# Altium PCB zhernakov_pwron_circuit.PcbDoc (part 2 of 2)
Units mm, origin at the board's own origin, x right, y up, seen from the top; angles counter-clockwise.
Board outline 108 x 46 mm, 2 copper layers (Top Layer, Bottom Layer), stack 1.57 mm thick; 57 components, 33 nets, 171 pads, 151 vias.
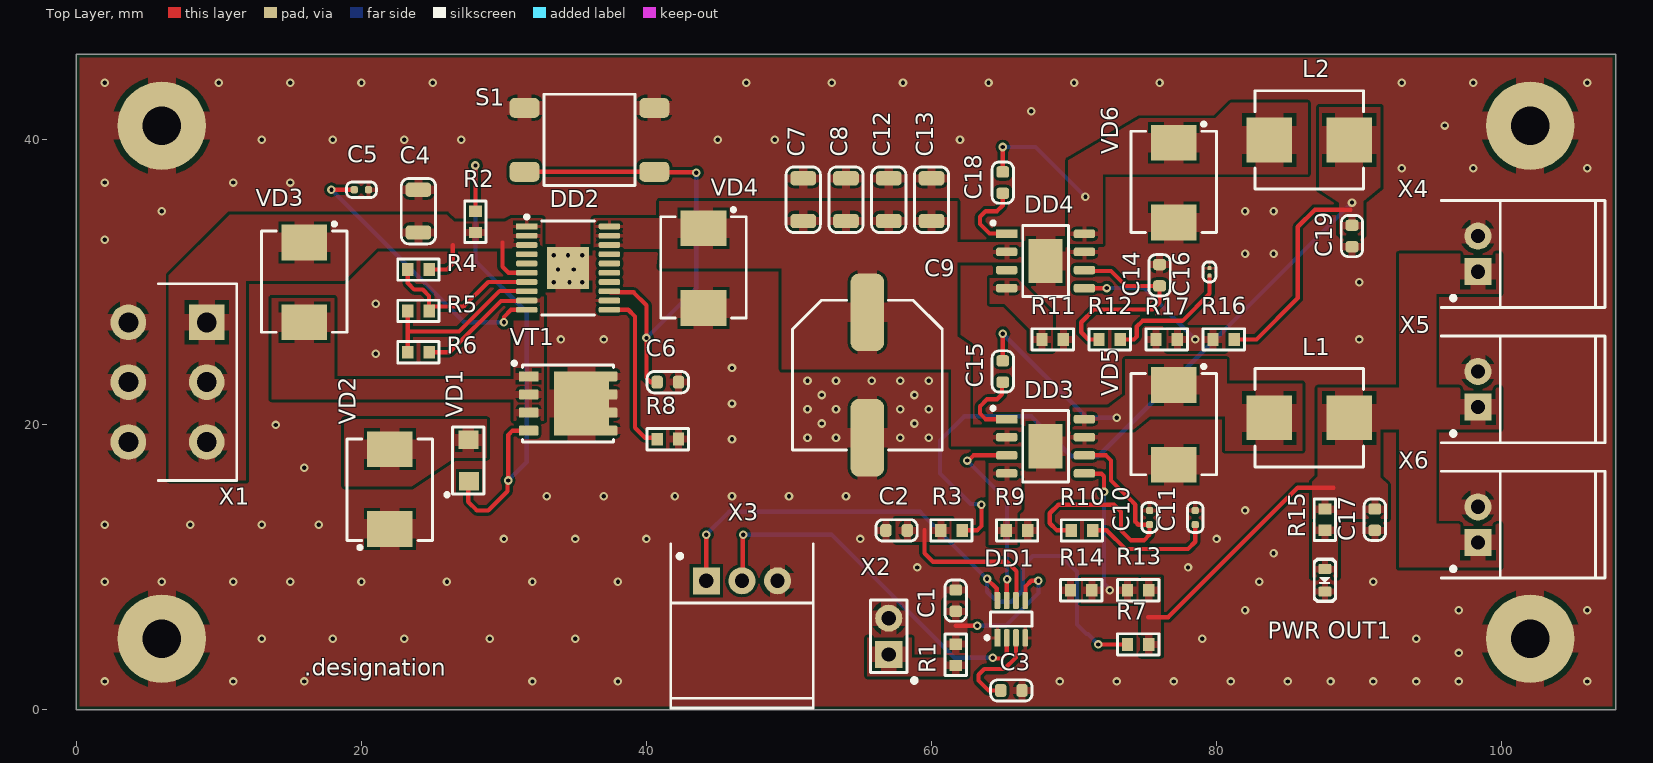
[diagram p0: Top Layer view]

## Silkscreen, mask and mechanical layers (free items; w line width, h text height) (continued)
Assembly Notes (Mech5): (continued)
  text "'.title'" at 0,-6 h2
  text "'.project'_'.pcb_dec_number'['.Pcb_File_Name_No_Path']" at 0,-8.5 h2